# Altium PCB PCB.pcbdoc (part 1 of 2)
Units mil, origin at the board's own origin, x right, y up, seen from the top; angles counter-clockwise.
Board outline 3545 x 2665 mil, 4 copper layers (Top Layer, VCC, GND, Bottom Layer), stack 62.447 mil thick; 58 components, 38 nets, 229 pads, 78 vias.
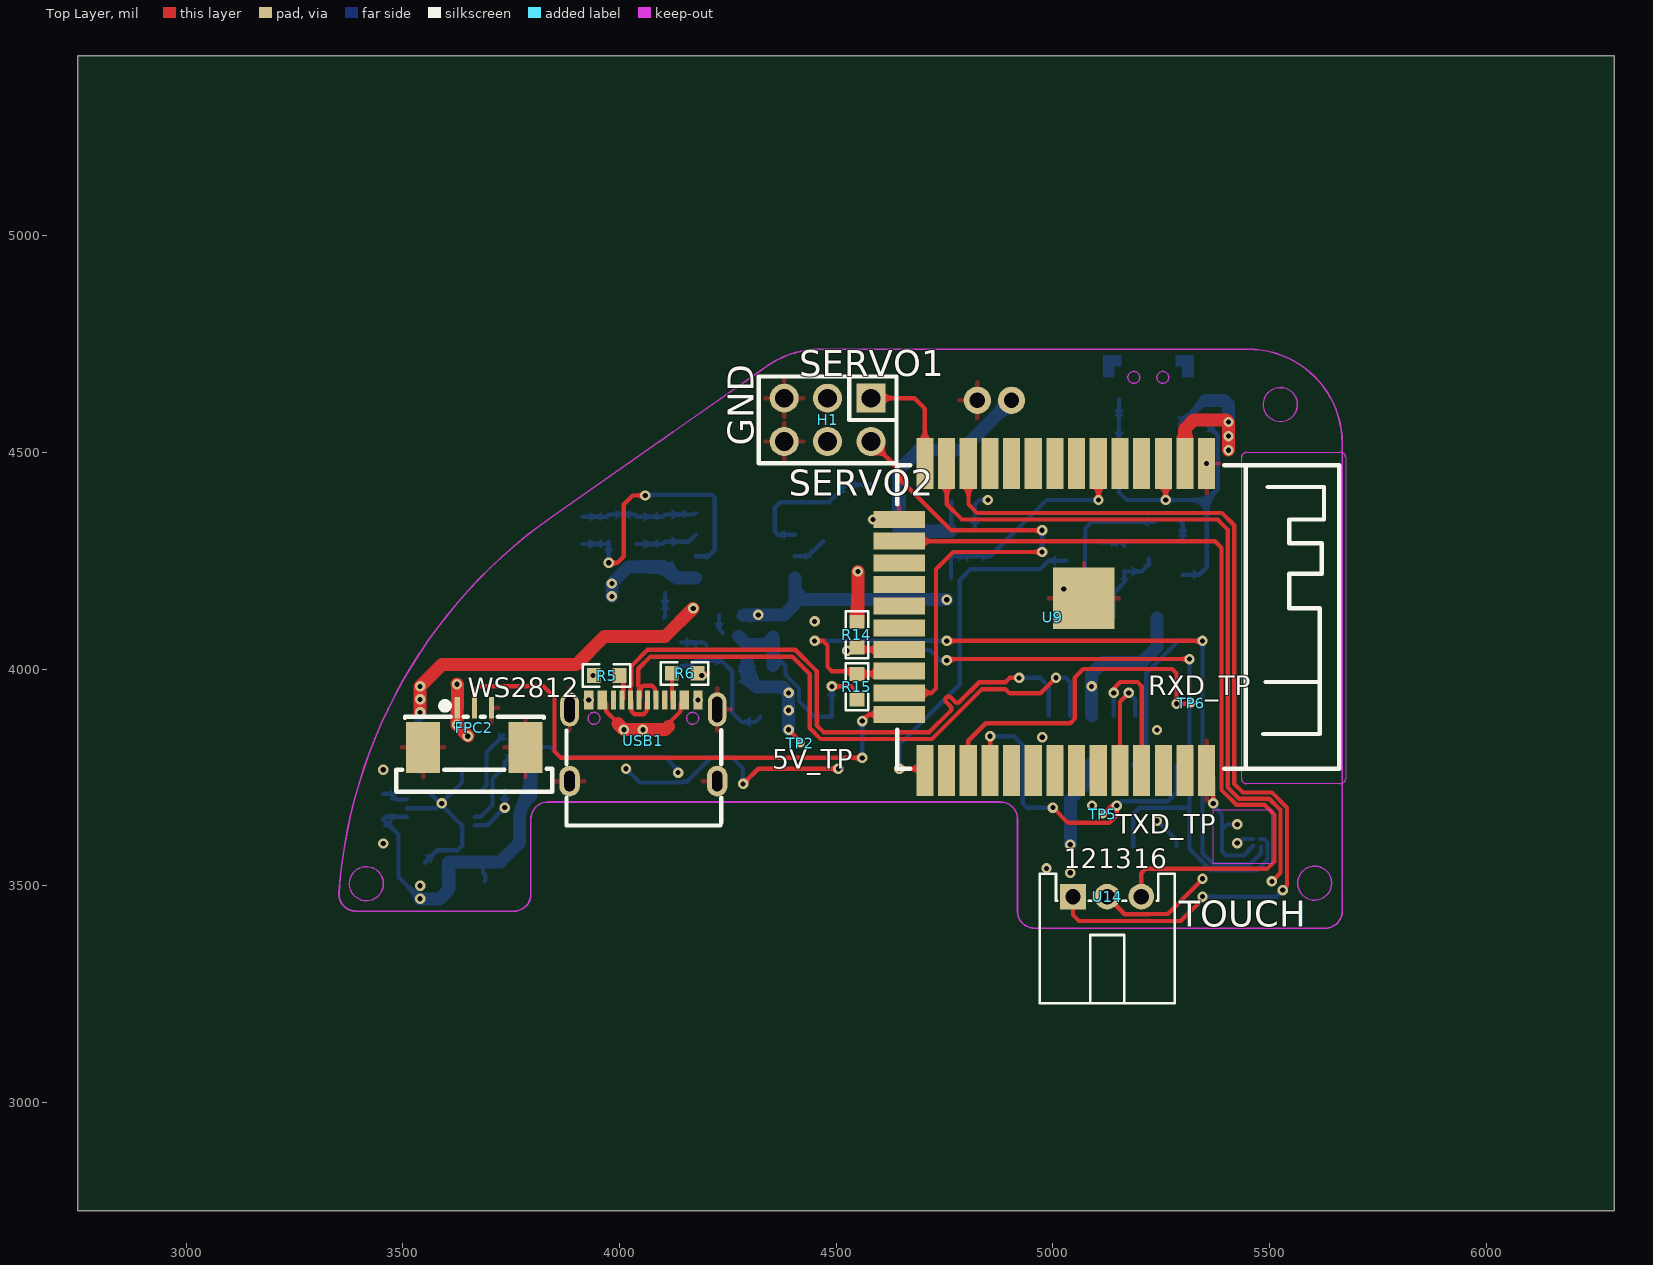
[diagram p0: Top Layer view]
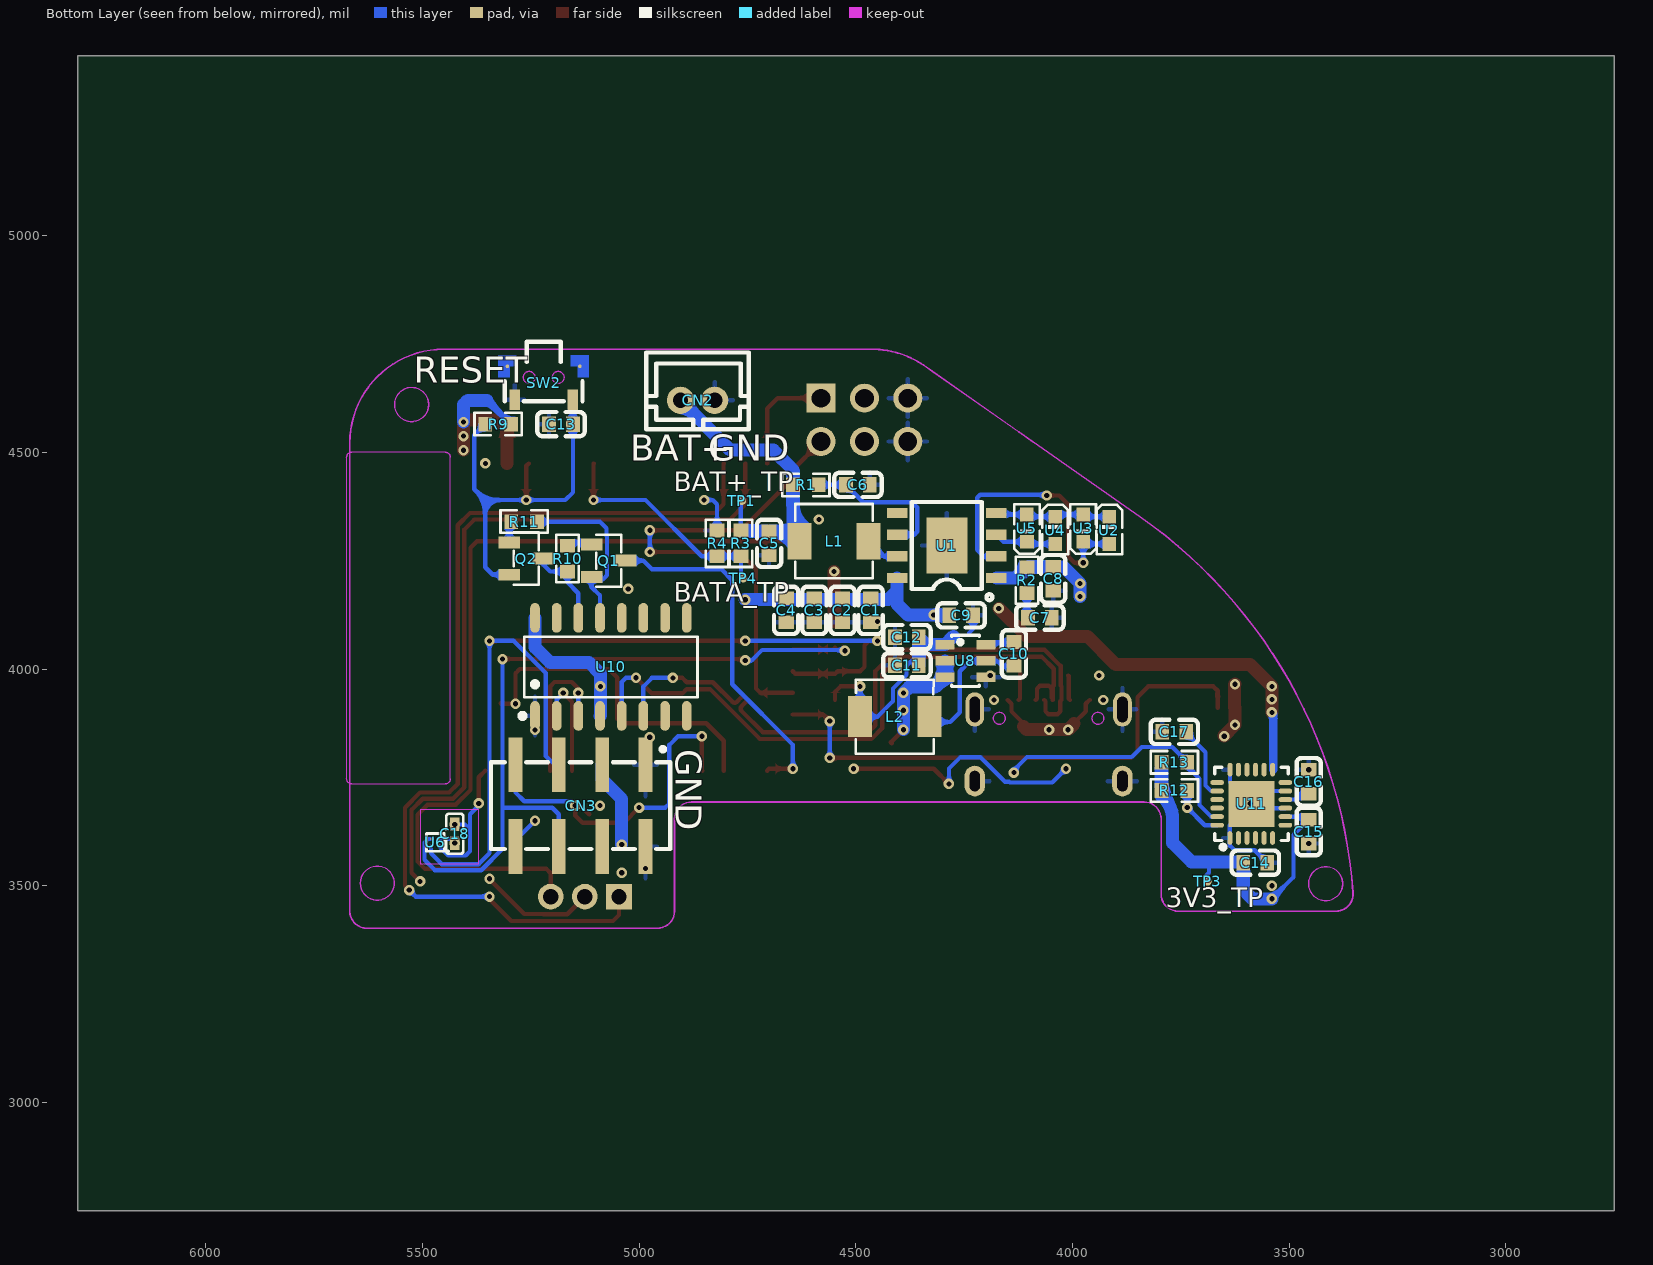
[diagram p1: Bottom Layer view, seen from below]
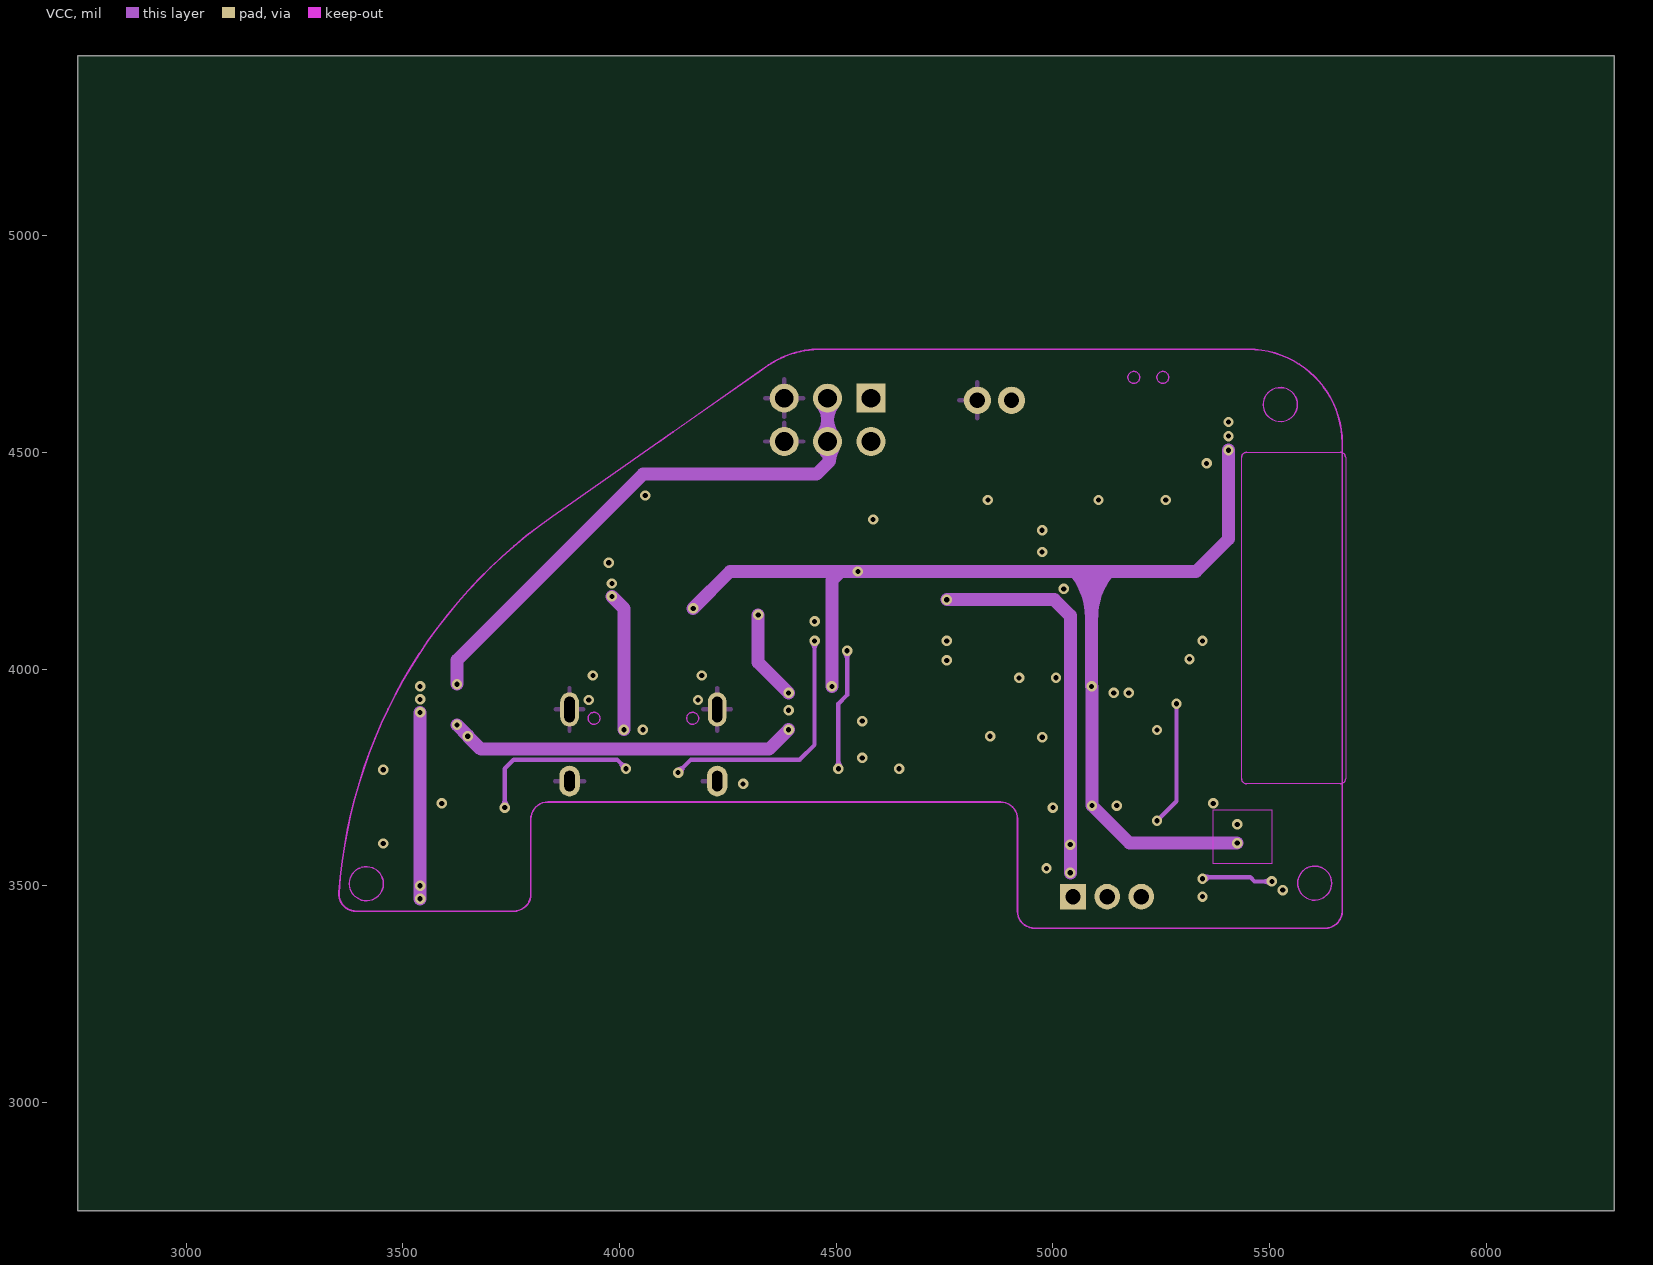
[diagram p2: VCC]
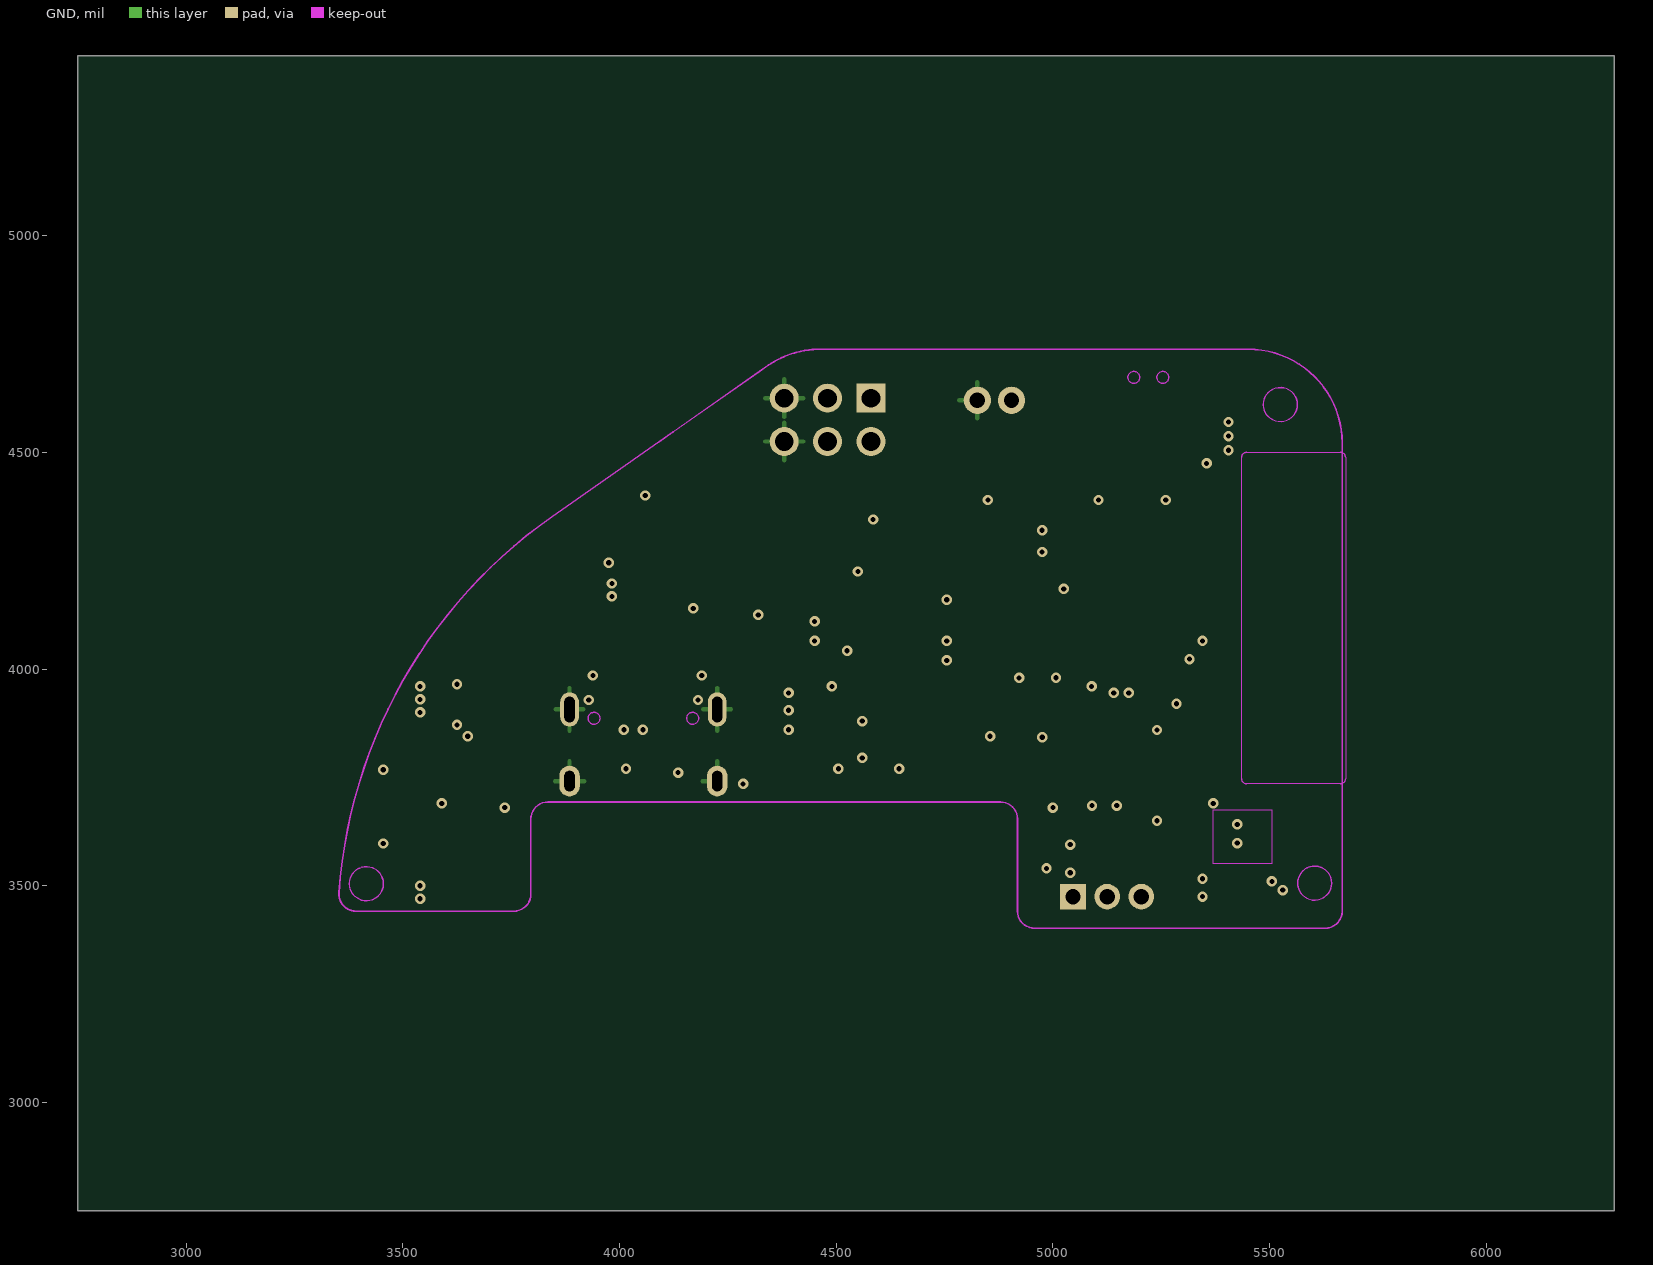
[diagram p3: GND]

## Layer stack, top to bottom
Top Layer: signal copper 1.378
Dielectric1: surface 8.283, 7628 RC49% 8.6mil, Dk 0
VCC: signal copper 0.598
Dielectric2: surface 41.929, 1.1mm H/HOZ Copper, Dk 0
GND: signal copper 0.598
Dielectric3: surface 8.283, 7628 RC49% 8.6mil, Dk 0
Bottom Layer: signal copper 1.378

## Board outline
6295,2750 2750,2750 2750,5415 6295,5415

## Design rules (kind name [scope] priority, off if disabled: settings)
BoardOutlineClearance copperThickness1oz [All] p0: genericclearance=10 ignorepadtopadclearanceinfootprint=FALSE except(0: Arc-SplitContinuation Track-SplitContinuation SMDPad-SplitContinuation THPad-SplitContinuation Via-SplitContinuation Fill-SplitContinuation Poly-SplitContinuation Region-SplitContinuation Text-SplitContinuation)
BoardOutlineClearance copperThickness2oz [All] p0: genericclearance=10 ignorepadtopadclearanceinfootprint=FALSE except(0: Arc-SplitContinuation Track-SplitContinuation SMDPad-SplitContinuation THPad-SplitContinuation Via-SplitContinuation Fill-SplitContinuation Poly-SplitContinuation Region-SplitContinuation Text-SplitContinuation)
BoardOutlineClearance otherClearance [All] p0: genericclearance=10 ignorepadtopadclearanceinfootprint=FALSE except(0: Arc-SplitContinuation Track-SplitContinuation SMDPad-SplitContinuation THPad-SplitContinuation Via-SplitContinuation Fill-SplitContinuation Poly-SplitContinuation Region-SplitContinuation Text-SplitContinuation)
Clearance copperThickness1oz [All] p1: gap=7 ignorepadtopadclearanceinfootprint=FALSE
Clearance copperThickness2oz [All] p1: gap=7 ignorepadtopadclearanceinfootprint=FALSE
Clearance otherClearance [All] p1: gap=7 ignorepadtopadclearanceinfootprint=FALSE
DiffPairsRouting differentialPair [All] p1: maxuncoupledlength=10 minlimit=6 maxlimit=Infinity mostfreqgap=6 toplayer_minwidth=5 toplayer_prefwidth=10 toplayer_maxwidth=100 bottomlayer_minwidth=5 bottomlayer_prefwidth=10 bottomlayer_maxwidth=100 midlayer1_minwidth=5 midlayer1_prefwidth=10 midlayer1_maxwidth=100 midlayer2_minwidth=5 midlayer2_prefwidth=10 midlayer2_maxwidth=100
PasteMaskExpansion pasteMaskExpansion [All] p1: expansion=0
PlaneConnect innerPlane [All] p1: planeconnectstyle=Relief reliefexpansion=20 reliefentries=4 reliefconductorwidth=10 reliefairgap=10
PolygonConnect copperRegion [All] p1: connectstyle=Relief reliefentries=4 reliefconductorwidth=10 polygonreliefangle="90 Angle" airgapwidth=10
RoutingVias viaSize [All] p1: viastyle="Through Hole" holewidth=12.0078 minholewidth=11.811 maxholewidth=248.0314 width=12.0078 minwidth=11.811 maxwidth=248.0314
SolderMaskExpansion solderMaskExpansion [All] p1: useseparateexpansions=TRUE expansion=2 expansionbottom=2
Width copperThickness1oz [All] p1: maxlimit=100 minlimit=5 preferedwidth=10
Width copperThickness2oz [All] p1: maxlimit=100 minlimit=8 preferedwidth=10

## Components (designator, comment, footprint, x,y, rotation, side; value= is the part's Value field where it differs from the comment)
C1 "" C0603_2 4465.62,4135.42 r90 bottom
C2 "" C0603_2 4530.62,4135.42 r90 bottom
C3 "" C0603_2 4595.62,4135.42 r90 bottom
C4 "" C0603_2 4660.62,4135.42 r90 bottom
C5 "" C0603_2 4700,4290 r90 bottom
C6 "" C0603_2 4495,4425 r0 bottom
C7 "" C0603_2 4075.2,4118.65 r0 bottom
C8 "" C0603_2 4044.57,4208.23 r90 bottom
C9 "" C0603_2 4256.98,4123.74 r0 bottom
C10 "" C0603 4135,4035 r90 bottom
C11 "" C0603_2 4381.98,4008.74 r180 bottom
C12 "" C0603_2 4381.98,4073.74 r180 bottom
C13 "" C0603_2 5180,4565 r180 bottom
C14 "" C0603 3578.24,3553.24 r0 bottom
C15 "" C0603 3455,3625 r90 bottom
C16 "" C0603 3455,3740 r270 bottom
C17 "" C0603_2 3765,3855 r180 bottom
C18 "" C0402 5425,3620 r270 bottom
CN2 "" CONN-TH_B2B-PH-K-S 4865,4620 r180 bottom
CN3 "" HDR-SMD_8P-P2.54-V-F-R2-C4-S7.1 5135,3685 r0 bottom
FPC2 "" FPC-SMD_3P-P1.00_HDGC_1.0K-MX-3PWB 3665,3865 r0 top
H1 "" HDR-TH_6P-P2.54-V-M-R2-C3-S2.54 4480,4575 r180 top
L1 "" IND-SMD_L4.4-W4.2 4550,4295 r180 bottom
L2 "" IND-SMD_L4.4-W4.2-A 4410,3890 r180 bottom
Q1 "" SOT-23-3_L2.9-W1.3-P1.90-LS2.4-BR_1 5070,4250 r0 bottom
Q2 "" SOT-23-3_L2.9-W1.3-P1.90-LS2.4-BR_1 5260,4255 r0 bottom
R1 "" R0603_3 4615,4425 r0 bottom
R2 "" R0603_3 4105,4205 r90 bottom
R3 "" R0603_3 4765,4290 r90 bottom
R4 "" R0603_3 4820,4290 r270 bottom
R5 "" R0603_3 3970,3985 r0 top
R6 "" R0603_3 4150,3990 r180 top
R9 "" R0603_2 5325,4565 r180 bottom
R10 "" R0603_2 5165,4255 r90 bottom
R11 "" R0603_2 5265,4340 r0 bottom
R12 "" R0603_2 3765,3720 r0 bottom
R13 "" R0603_2 3765,3785 r0 bottom
R14 "" R0603_3 4547.72,4079.19 r270 top
R15 "" R0603_3 4547.72,3959.19 r270 top
SW2 "" SW-SMD_2P-TS24CA 5220,4660 r180 bottom
TP1 "" Test-Point-0.5mm#1 4762.85,4388.21 r0 top
TP2 "" Test-Point-0.5mm#2 4417.22,3828.84 r0 top
TP3 "" Test-Point-0.5mm#1 3688.48,3510.1 r0 top
TP4 "" Test-Point-0.5mm#1 4759.74,4209.47 r0 top
TP5 "" Test-Point-0.5mm#2 5115,3665 r0 top
TP6 "" Test-Point-0.5mm#2 5319.11,3921.36 r0 top
U1 "" ESOP-8_L4.9-W3.9-P1.27-LS6.0-BL-EP 4290,4285 r90 bottom
U2 "" LED0603-RD_GREEN 3915,4320 r270 bottom
U3 "" LED0603-RD_GREEN 3975,4325 r90 bottom
U4 "" LED0603-RD_GREEN 4040,4320 r270 bottom
U5 "" LED0603-RD_GREEN 4105,4325 r90 bottom
U6 "" X1-WLB0808-4_L0.8-W0.8-P0.40-TL 5470,3600 r0 bottom
U8 "" TSOT-26_L2.9-W1.6-P0.95-LS2.8-BL_1 4246.98,4018.74 r270 bottom
U9 "" WIRELM-SMD_ESP32-S_1 5000,4120 r270 top
U10 "" SOP-16_L10.0-W3.9-P1.27-LS6.0-BL_1 5065,4005 r180 bottom
U11 "" QFN-24_L4.0-W4.0-P0.50-BL-EP2.7_1 3587.56,3689.03 r180 bottom
U14 "" CONN-TH_3P-P2.00_S3B-PH-K-S-LF-SN 5125,3475 r0 top
USB1 "" USB-C-SMD_TYPE-C-6PIN-2MD-073 4055,3835 r0 top

## Footprints (in the part's own frame and the unit in brackets; to place one, negate y for a bottom-side part, rotate by r counter-clockwise, add the part's x,y. Pads: shape width x height; smd on the part's side, far side on the other; paste and mask are expansions set on the pad)
C0402 [mm]
  rect 0.79x0.54 smd: 1(-0.545,0) 2(0.545,0)
  silkscreen extent -1.17,-0.5 1.17,0.5
C0603 [mm]
  rect 0.8x0.9 smd: 1(-0.7,0) 2(0.7,0)
  silkscreen extent -1.39,-0.71 1.39,0.71
C0603_2 [mm]
  rect 0.8x0.9 smd: 1(-0.7,0) 2(0.7,0)
  silkscreen extent -1.39,-0.71 1.39,0.71
CONN-TH_3P-P2.00_S3B-PH-K-S-LF-SN [mm]
  rect 1.5x1.5 hole 0.9: 1(-2,0)
  round 1.5 hole 0.9: 2(0,0) 3(2,0)
  silkscreen extent -3.95,-6.25 3.95,1.35
CONN-TH_B2B-PH-K-S [mm]
  round 1.6 hole 0.9: 1(1,0) 2(-1,0)
  silkscreen extent -3,-1.7 3,2.8
ESOP-8_L4.9-W3.9-P1.27-LS6.0-BL-EP [mm]
  rect 0.6x1.2 smd: 1(-1.905,-2.908) 2(-0.635,-2.908) 3(0.635,-2.908) 4(1.905,-2.908) 5(1.905,2.908) 6(0.635,2.908) 7(-0.635,2.908) 8(-1.905,2.908)
  rect 3.3x2.4 smd: 9(0,0)
  silkscreen extent -3.2,-2.67 2.55,2.05
FPC-SMD_3P-P1.00_HDGC_1.0K-MX-3PWB [mm]
  rect 0.3x1.25 smd: 1(-1,1.162) 2(0,1.162) 3(1,1.162)
  rect 2x3 smd: 4(3,-1.162) 5(-3,-1.162)
  silkscreen extent -4.57,-3.76 4.58,1.47
HDR-SMD_8P-P2.54-V-F-R2-C4-S7.1 [mm]
  rect 0.8x3.2 smd: 1(-3.81,-2.4) 2(-3.81,2.4) 3(-1.27,-2.4) 4(-1.27,2.4) 5(1.27,-2.4) 6(1.27,2.4) 7(3.81,-2.4) 8(3.81,2.4)
  silkscreen extent -5.25,-3.43 5.25,2.54
HDR-TH_6P-P2.54-V-M-R2-C3-S2.54 [mm]
  rect 1.7x1.7 hole 1.1: 1(-2.54,-1.27)
  round 1.7 hole 1.1: 2(-2.54,1.27) 3(0,-1.27) 4(0,1.27) 5(2.54,-1.27) 6(2.54,1.27)
  silkscreen extent -4.04,-2.54 4.04,2.54
IND-SMD_L4.4-W4.2 [mm]
  rect 1.4x2.12 smd: 1(2.028,0) 2(-2.028,0)
  silkscreen extent -2.28,-2.18 2.28,2.18
IND-SMD_L4.4-W4.2-A [mm]
  rect 1.4x2.4 smd: 1(2.028,0) 2(-2.028,0)
  silkscreen extent -2.28,-2.18 2.28,2.18
LED0603-RD_GREEN [mm]
  rect 0.8x0.8 smd: 1(-0.799,-0.003) 2(0.799,0.003)
  silkscreen extent -1.49,-0.75 1.39,0.76
QFN-24_L4.0-W4.0-P0.50-BL-EP2.7_1 [mm]
  oval 0.28x0.8 smd: 1(-1.25,-2) 2(-0.75,-2) 3(-0.25,-2) 4(0.25,-2) 5(0.75,-2) 6(1.25,-2) 13(1.25,2) 14(0.75,2) 15(0.25,2) 16(-0.25,2) 17(-0.75,2) 18(-1.242,2)
  oval 0.8x0.28 smd: 7(2,-1.25) 8(2,-0.75) 9(2,-0.25) 10(2,0.25) 11(2,0.75) 12(2,1.25) 19(-2,1.25) 20(-2,0.75) 21(-2,0.25) 22(-2,-0.25) 23(-2,-0.75) 24(-2,-1.25)
  rect 2.7x2.7 smd: 25(0.012,0)
  silkscreen extent -2.14,-2.79 2.16,2.15
R0603_2 [mil]
  rect 31.75x34.02 smd: 1(-29.66,0) 2(29.66,0)
  silkscreen extent -55,-26 55,26
R0603_3 [mil]
  rect 31.75x34.02 smd: 1(-29.66,0) 2(29.66,0)
  silkscreen extent -55,-26 55,26
SOP-16_L10.0-W3.9-P1.27-LS6.0-BL_1 [mm]
  oval 0.56x1.745 smd: 1(-4.445,-2.872) 2(-3.175,-2.872) 3(-1.905,-2.872) 4(-0.635,-2.872) 5(0.635,-2.872) 6(1.905,-2.872) 7(3.175,-2.872) 8(4.445,-2.872) 9(4.445,2.872) 10(3.175,2.872) 11(1.905,2.872) 12(0.635,2.872) 13(-0.635,2.872) 14(-1.905,2.872) 15(-3.175,2.872) 16(-4.445,2.872)
  silkscreen extent -5.33,-3.02 5.08,1.77
SOT-23-3_L2.9-W1.3-P1.90-LS2.4-BR_1 [mm]
  rect 1.25x0.7 smd: 1(1,-0.95) 2(1,0.95) 3(-1,0)
  silkscreen extent -0.73,-1.53 0.73,1.53
SW-SMD_2P-TS24CA [mm]
  rect 0.6x1.2 smd: 1(-1.7,-0.975) 2(1.7,-0.975)
  round 0.21 smd: 3(2.125,0.975) 4(-2.125,0.975)
  Top Layer region: -1.6,0.975 -1.6,1.625 -2.65,1.625 -2.65,0.325 -2,0.325 -2,0.975 -1.6,0.975
  Top Layer region: 2.65,0.325 2.65,1.625 1.6,1.625 1.6,0.975 1.6,0.975 2,0.975 2,0.325
  Board Outline Layer circle w0.003: c0.85,0.325 r0.35
  Board Outline Layer circle w0.003: c-0.85,0.325 r0.35
  Board Outline Layer region: 0.5,0.325 0.535,0.173 0.632,0.051 0.772,-0.016 0.928,-0.016 1.068,0.051 1.165,0.173 1.2,0.325 1.2,0.325 1.165,0.477 1.068,0.599 0.928,0.666 0.772,0.666 0.632,0.599 0.535,0.477 0.5,0.325
  Board Outline Layer region: 0.5,0.325 0.535,0.173 0.632,0.051 0.772,-0.016 0.928,-0.016 1.068,0.051 1.165,0.173 1.2,0.325 1.2,0.325 1.165,0.477 1.068,0.599 0.928,0.666 0.772,0.666 0.632,0.599 0.535,0.477 0.5,0.325
  Board Outline Layer region: -1.2,0.325 -1.165,0.173 -1.068,0.051 -0.928,-0.016 -0.772,-0.016 -0.632,0.051 -0.535,0.173 -0.5,0.325 -0.5,0.325 -0.535,0.477 -0.632,0.599 -0.772,0.666 -0.928,0.666 -1.068,0.599 -1.165,0.477 -1.2,0.325
  Board Outline Layer region: -1.2,0.325 -1.165,0.173 -1.068,0.051 -0.928,-0.016 -0.772,-0.016 -0.632,0.051 -0.535,0.173 -0.5,0.325 -0.5,0.325 -0.535,0.477 -0.632,0.599 -0.772,0.666 -0.928,0.666 -1.068,0.599 -1.165,0.477 -1.2,0.325
  silkscreen extent -2.28,-1.07 2.28,2.43
Test-Point-0.5mm#1 [mm]
  round 0.5 smd far side: 1(0,0)
Test-Point-0.5mm#2 [mm]
  round 0.5 smd: 1(0,0)
TSOT-26_L2.9-W1.6-P0.95-LS2.8-BL_1 [mm]
  rect 0.55x1.1 smd: 1(-0.95,-1.2) 2(0,-1.2) 3(0.95,-1.2) 4(0.95,1.2) 5(0,1.2) 6(-0.95,1.2)
  silkscreen extent -1.5,-0.8 1.5,0.8
USB-C-SMD_TYPE-C-6PIN-2MD-073 [mm]
  rect 0.55x1.1 smd: 1(-3.2,2.375) 2(-2.4,2.375) 11(2.4,2.375) 12(3.2,2.375)
  rect 0.3x1.1 smd: 3(-1.75,2.375) 4(-1.25,2.375) 5(-0.75,2.375) 6(-0.25,2.375) 7(0.25,2.375) 8(0.75,2.375) 9(1.25,2.375) 10(1.75,2.375)
  oval 1.2x1.8 hole 0.6 slot 1.2 at 90 deg: 13(-4.325,-2.375) 14(4.325,-2.375)
  oval 1.1x2 hole 0.6 slot 1.5 at 90 deg: 13(-4.325,1.825) 14(4.325,1.825)
  Board Outline Layer circle w0.003: c-2.89,1.305 r0.35
  Board Outline Layer circle w0.003: c2.89,1.305 r0.35
  Board Outline Layer region: -2.54,1.305 -2.575,1.153 -2.672,1.031 -2.812,0.964 -2.968,0.964 -3.108,1.031 -3.205,1.153 -3.24,1.305 -3.24,1.305 -3.205,1.457 -3.108,1.579 -2.968,1.646 -2.812,1.646 -2.672,1.579 -2.575,1.457 -2.54,1.305
  Board Outline Layer region: -2.54,1.305 -2.575,1.153 -2.672,1.031 -2.812,0.964 -2.968,0.964 -3.108,1.031 -3.205,1.153 -3.24,1.305 -3.24,1.305 -3.205,1.457 -3.108,1.579 -2.968,1.646 -2.812,1.646 -2.672,1.579 -2.575,1.457 -2.54,1.305
  Board Outline Layer region: 3.24,1.305 3.205,1.153 3.108,1.031 2.968,0.964 2.812,0.964 2.672,1.031 2.575,1.153 2.54,1.305 2.54,1.305 2.575,1.457 2.672,1.579 2.812,1.646 2.968,1.646 3.108,1.579 3.205,1.457 3.24,1.305
  Board Outline Layer region: 3.24,1.305 3.205,1.153 3.108,1.031 2.968,0.964 2.812,0.964 2.672,1.031 2.575,1.153 2.54,1.305 2.54,1.305 2.575,1.457 2.672,1.579 2.812,1.646 2.968,1.646 3.108,1.579 3.205,1.457 3.24,1.305
  silkscreen extent -4.5,-4.97 4.57,0.6
WIRELM-SMD_ESP32-S_1 [mm]
  rect 3x1 smd: 1(-9,9.005) 2(-9,7.735) 3(-9,6.465) 4(-9,5.195) 5(-9,3.925) 6(-9,2.655) 7(-9,1.385) 8(-9,0.115) 9(-9,-1.155) 10(-9,-2.425) 11(-9,-3.695) 12(-9,-4.965) 13(-9,-6.235) 14(-9,-7.505) 25(9,-7.505) 26(9,-6.235) 27(9,-4.965) 28(9,-3.695) 29(9,-2.425) 30(9,-1.155) 31(9,0.115) 32(9,1.385) 33(9,2.655) 34(9,3.925) 35(9,5.195) 36(9,6.465) 37(9,7.735) 38(9,9.005)
  rect 1x3 smd: 15(-5.715,-9.005) 16(-4.445,-9.005) 17(-3.175,-9.005) 18(-1.905,-9.005) 19(-0.635,-9.005) 20(0.635,-9.005) 21(1.905,-9.005) 22(3.175,-9.005) 23(4.445,-9.005) 24(5.715,-9.005)
  rect 3.6x3.6 smd: 39(-1.105,1.815)
  silkscreen extent -8.89,-9.13 8.89,16.78
X1-WLB0808-4_L0.8-W0.8-P0.40-TL [mm]
  round 0.18 smd: A1(-0.2,0.2) A2(0.2,0.2) B1(-0.2,-0.2) B2(0.2,-0.2)
  silkscreen extent -0.8,-0.52 0.52,0.55

## Via types
v1: diameter 24.02, hole 12.01, Top Layer to Bottom Layer, 78 vias

## Nets (pads, with @x,y where several pads share a name; then routed paths per layer and width w, separated by ;. In a path a pad name is that pad's centre, name@x,y a point inside that pad or via, vN(x,y) a via of type N, cw(c..) or ccw(c..) an arc to the next point about the centre after c; other vN are vias at no path point)
$1N29: C17.2 U11.20 | length 164.4
  Bottom Layer w10: U11.20@3666.3,3718.56 3680.19,3718.56 3693.04,3731.41 3693.04,3808.04 C17.2@3732.44,3847.44
$1N30: C16.2 U11.10 | length 59.4
  Bottom Layer w10: C16.2@3455,3712.44 3472.56,3712.44 3486.13,3698.87 U11.10@3508.82,3698.87
$1N50: Q2.1 R11.2 | length 49.6
  Bottom Layer w10: R11.2@5294.66,4340 5299.37,4335.29 Q2.1@5299.37,4292.4
$1N52: Q1.1 R10.2 | length 58.8
  Bottom Layer w10: Q1.1@5109.37,4292.4 5157.26,4292.4 R10.2@5165,4284.66
$1N75: C10.1 L2.1 U8.5 | length 307.4
  Bottom Layer w10: C10.1@4141.98,4006.18 4161.18,4006.18 4173.74,4018.74 U8.5@4199.73,4018.74 4236.26,4018.74 4260,3995 4260,3900 4282.07,3877.93 4313.09,3877.93 L2.1@4325.16,3890
$1N76: C10.2 U8.6 | length 59.9
  Bottom Layer w10: C10.2@4141.98,4061.3 4194.58,4061.3 U8.6@4199.73,4056.14
$1N104: U1.3 U4.2 U5.1 | length 144.5
  Bottom Layer w10: U4.2@4039.86,4288.52 4099.87,4288.52 U5.1@4104.87,4293.52 4159.02,4293.52 U1.3@4175.5,4310
$1N105: U1.4 U2.1 U3.2 U4.1 U5.2 | length 268
  Bottom Layer w10: U2.1@3915.13,4351.48 3970.14,4351.48 U3.2@3975.14,4356.48 4035.13,4356.48 U4.1@4040.13,4351.48 4100.14,4351.48 U5.2@4105.14,4356.48 4171.98,4356.48 U1.4@4175.5,4360
$1N106: U1.2 U2.2 U3.1 | length 664.7
  Top Layer w10: v1(3975,4245) 3995,4245 4010,4260 4010,4380 4030.43,4400.43 v1(4059.57,4400.43)
  Bottom Layer w10: U2.2@3914.86,4288.52 3969.87,4288.52 U3.1@3974.87,4293.52 3975,4293.39 v1(3975,4245) ; v1(4059.57,4400.43) 4061.21,4402.07 4212.93,4402.07 4220,4395 4220,4275 4205,4260 U1.2@4175.5,4260
$1N108: C7.2 R2.1 | length 57.6
  Bottom Layer w10: C7.2@4102.76,4118.65 4105,4120.89 R2.1@4105,4175.34
$1N115: C6.2 R1.1 U1.6 | length 354.3
  Bottom Layer w10: U1.6@4404.5,4310 4365,4310 4357.93,4317.07 4357.93,4372.93 4370,4385 4482.56,4385 C6.2@4522.56,4425 R1.1@4585.34,4425
$1N117: L1.1 U1.7 | length 80.2
  Bottom Layer w10: U1.7@4404.5,4260 4435.16,4260 L1.1@4470.16,4295
$1N272: R6.2 USB1.10 | length 63
  Top Layer w10: R6.2@4120.34,3990 4121.1,3989.24 4121.1,3931.31 USB1.10@4123.9,3928.51
$1N273: R5.2 USB1.4 | length 58.1
  Top Layer w10: USB1.4@4005.8,3928.51 4008.59,3931.3 4008.59,3983.93 R5.2@4009.66,3985
+5V: C8.2 R2.2 U1.1 USB1.2 USB1.11 | length 839.8
  Top Layer w10: USB1.2@3960.51,3928.51 3969.22,3919.8 3969.22,3902.3 3996.16,3875.35 3996.16,3873.84 ; 4112.96,3867.27 4112.96,3874.47 4140.79,3902.3 4140.79,3919.8 USB1.11@4149.49,3928.51
  Top Layer w30: 3996.16,3873.84 v1(4010,3860) v1(4053.94,3860) 4105.69,3860 4112.96,3867.27
  VCC w30: v1(3982.44,4167.56) 4010,4140 v1(4010,3860)
  Bottom Layer w30: v1(3982.44,4167.56) v1(3982.44,4197.44) 4020.79,4235.79 C8.2@4044.57,4235.79 4103.87,4235.79 R2.2@4105,4234.66 4127.46,4212.2 4130.7,4212.2 4132.9,4210 U1.1@4175.5,4210
BAT_+: C5.2 CN2.2 L1.2 R1.2 R3.2 TP1.1 | length 666.8
  Bottom Layer w10: R3.2@4765,4319.66 TP1.1@4765,4386.06
  Bottom Layer w30: R3.2@4765,4319.66 4762.9,4317.56 C5.2@4700,4317.56 4652.4,4317.56 4644.66,4309.82 R1.2@4644.66,4425 4644.66,4459.66 4690,4505 4789.37,4505 CN2.2@4904.37,4620
BAT_ADC: R3.1 R4.2 TP4.1 U9.6 | length 529.2
  Top Layer w10: U9.6@5104.53,4474.33 5105,4473.86 v1(5105,4390)
  Bottom Layer w10: TP4.1@4764.74,4209.47 4764.74,4260.08 R3.1@4765,4260.34 R4.2@4820,4260.34 4855.34,4260.34 4985,4390 v1(5105,4390)
DTR: Q1.2 R11.1 U10.13 | length 424.9
  Bottom Layer w10: U10.13@5090,4118.09 5090,4170 5110,4190 5110,4216.97 Q1.2@5109.37,4217.6 ; Q1.2@5109.37,4212.6 5104.7,4207.93 5082.07,4207.93 5073.78,4216.22 5073.78,4305.73 5075,4306.95 5075,4325 5090,4340 R11.1@5235.34,4340
EN: C13.2 Q2.2 R9.1 SW2.2 U9.3 | length 924.4
  Top Layer w10: U9.3@5254.53,4474.33 5260,4468.86 v1(5260,4390)
  Bottom Layer w10: SW2.2@5153.07,4621.61 5152.44,4620.98 C13.2@5152.44,4565 5152.44,4407.56 5170,4390 v1(5260,4390) 5355,4390 ; Q2.2@5299.37,4217.6 5337.6,4217.6 5355,4235 5355,4390 ; R9.1@5354.66,4565 5380,4539.66 5380,4415 5355,4390
GND: C1.1 C2.1 C3.1 C4.1 C5.1 C6.1 C7.1 C8.1 C9.1 C11.1 C12.1 C13.1 C14.1 C15.1 C16.1 C17.1 C18.1 CN2.1 CN3.1 CN3.2 FPC2.3 FPC2.4 FPC2.5 H1.5 H1.6 R4.1 R5.1 R6.1 SW2.1 U1.9 U6.A1 U8.4 U9.1 U9.15 U9.38 U9.39 U10.1 U11.1 U11.9 U11.11 U11.18 U11.25 USB1.1 USB1.12 USB1.13 USB1.14 | length 957.9
  Top Layer w10: U9.38@5354.53,3765.67 5370,3750.2 v1(5370,3690)
  Bottom Layer w10: U11.9@3508.82,3679.19 3577.23,3679.19 U11.25@3587.07,3689.03 ; U11.11@3508.82,3718.56 3557.54,3718.56 U11.25@3587.07,3689.03 ; C14.1@3550.68,3553.24 3579.38,3581.94 3626.09,3581.94 3636.77,3592.62 U11.1@3636.77,3610.29 3636.77,3639.33 U11.25@3587.07,3689.03 ; U11.18@3636.46,3767.77 3636.46,3738.42 U11.25@3587.07,3689.03 ; C9.1@4229.41,4123.74 4229.41,4092.65 4238.83,4083.24 ; R4.1@4820,4319.66 4820,4380 4830,4390 v1(4850,4390) ; v1@5365,3690 5390,3665 5390,3630 ; v1(5425,3641.46) 5401.46,3641.46 5390,3630 ; U6.A1@5462.13,3592.12 5440.01,3570 5400,3570 5390,3580 5390,3630
  other v1: 4985,3540 3455,3597.44 3590,3690 3455,3767.56 4975.14,3842.69 5240,3859.33 3929.01,3928.51 4180.98,3928.51 3938.7,3985 4189.66,3985 4450,4110 5025,4185 4585,4345 5354.53,4474.33
IO0: Q1.3 U9.25 | length 818.6
  Top Layer w10: v1(4645,3770) 4700.2,3770 U9.25@4704.53,3765.67
  Bottom Layer w10: v1(4645,3770) 4645,3825 4785,3965 4785,4205 4810,4230 4970,4230 4990,4250 Q1.3@5030.63,4250
LED_DI: FPC2.2 U9.24 | length 1256.6
  Top Layer w10: FPC2.2@3665,3910.76 3665,3950 3675,3960 3825,3960 3850,3935 3850,3810 3865,3795 v1(4560,3795) ; v1(4560,3880) 4575,3895 U9.24@4645.47,3895
  Bottom Layer w10: v1(4560,3795) v1(4560,3880)
RTS: Q2.3 R10.1 U10.14 | length 194.2
  Bottom Layer w10: U10.14@5140,4118.09 5140,4175 5165,4200 R10.1@5165,4225.34 5165.34,4225 5205,4225 5220.63,4240.63 Q2.3@5220.63,4255
RXD: U9.34 U10.2 | length 247.1
  Top Layer w10: U9.34@5154.53,3765.67 5154.53,3924.53 v1(5175,3945)
  Bottom Layer w10: v1(5175,3945) 5190,3930 U10.2@5190,3891.91
RXD_TO_WATCHER: CN3.8 TP6.1 U9.27 | length 1149.1
  Top Layer w10: U9.27@4804.53,3765.67 4804.53,3834.53 4845,3875 5040,3875 5050,3885 5050,3980 5070,4000 5275,4000 5285,3990 v1(5285,3920) 5317.76,3920 TP6.1@5319.11,3921.36
  VCC w10: v1(5240,3650) 5285,3695 v1(5285,3920)
  Bottom Layer w10: v1(5240,3650) 5285,3605 CN3.8@5285,3590.51
SCL: CN3.5 R13.1 R15.1 U6.A2 U9.22 U11.23 | length 3390.7
  Top Layer w10: v1(4450,4065) 4470,4065 4480,4055 4480,4005 4490,3995 4541.57,3995 R15.1@4547.72,3988.85 4639.32,3988.85 U9.22@4645.47,3995 ; v1(4755,4065) v1(5345,4065)
  VCC w10: v1(4135.18,3761.17) 4165,3790.98 4415.98,3790.98 4450,3825 v1(4450,4065)
  Bottom Layer w10: U11.23@3666.3,3659.5 3680.18,3659.5 3707.05,3686.37 3707.05,3746.71 3735.34,3775 3735.34,3785.34 3770,3820 3840.36,3820 3863.39,3796.97 4105,3796.97 4135.18,3766.79 v1(4135.18,3761.17) ; v1(4450,4065) v1(4755,4065) ; CN3.5@5185,3779.49 5195,3779.49 5215,3799.49 5215,3991.04 5288.96,4065 v1(5345,4065) 5345,3575 5370,3550 5455,3550 5480,3575 U6.A2@5480,3590
SDA: CN3.6 R12.1 R14.2 U6.B2 U9.21 U11.24 | length 3228
  Top Layer w10: v1(4285,3735) 4320,3770 v1(4505,3770) ; v1@4525,4044.02 4542.21,4044.02 R14.2@4547.72,4049.53 4552.25,4045 U9.21@4645.47,4045 ; v1(4755,4020) 4757.99,4022.99 v1(5315,4022.99)
  VCC w10: v1(3735.34,3680.34) 3735.34,3770.34 3755.98,3790.98 3994.02,3790.98 v1(4015,3770) ; v1(4505,3770) 4505,3920 4525,3940 v1@4525,4044.02
  Bottom Layer w10: U11.24@3666.3,3639.82 3694.82,3639.82 v1(3735.34,3680.34) R12.1@3735.34,3720 ; v1(4015,3770) 4046.83,3738.17 4144.7,3738.17 4146.53,3740 4155.53,3740 4211.69,3796.16 4259.19,3796.16 4285,3770.36 v1(4285,3735) ; v1@4525,4044.02 4715.98,4044.02 4740,4020 v1(4755,4020) ; CN3.6@5185,3590.51 5185,3665 5200,3680 5313.85,3680 5315,3681.15 ; v1(5315,4022.99) 5315,3681.15 ; U6.B2@5477.87,3607.88 5487.12,3607.88 5495,3600 5495,3560 5470.98,3535.98 5364.19,3535.98 5315,3585.18 5315,3681.15
  other v1: 4525,4042.01
SERVO1: H1.1 U9.14 | length 260.8
  Top Layer w10: H1.1@4580,4625 4680,4625 4704.53,4600.47 U9.14@4704.53,4474.33
SERVO2: H1.2 U9.23 | length 1167.1
  Top Layer w10: H1.2@4580,4525 4650,4455 4650,4434.59 4680.3,4404.29 4680.71,4404.29 4765,4320 v1(4975,4320) ; U9.23@4645.47,3945 4720,3945 4730,3955 4730,4230 4770,4270 v1(4975,4270)
  Bottom Layer w10: v1(4975,4270) v1(4975,4320)
TOUCH1: U9.12 U14.1 | length 2228.2
  Top Layer w10: U9.12@4804.53,4474.33 4805,4473.86 4805,4380 4825,4360 5390,4360 5418.19,4331.81 5418.19,3734.96 5438.14,3715 5505,3715 5540,3680 5540,3500 v1(5530,3490) ; U14.1@5046.26,3475 5046.26,3432.54 5060,3418.8 5295,3418.82 5345,3468.82 v1(5345,3475)
  Bottom Layer w10: v1(5345,3475) 5515,3475 v1(5530,3490)
TOUCH2: U9.13 U14.2 | length 2115.3
  Top Layer w10: U9.13@4754.53,4474.33 4755,4473.86 4755,4380 4789.91,4345.09 5379.91,4345.09 5402.93,4322.07 5402.93,3727.07 5410,3720 5410.18,3720 5429.19,3700.98 5499.02,3700.98 5525,3675 5525,3530 v1(5505,3510) ; U14.2@5125,3475 5165.51,3434.49 5220.52,3434.49 5221.03,3435 5265,3435 5345,3515 v1(5345,3515.97)
  VCC w10: v1(5345,3515.97) 5349.03,3520 5455,3520 5465,3510 v1(5505,3510)
TOUCH3: U9.16 U14.3 | length 1934.6
  Top Layer w10: U9.16@4645.47,4295 5373.91,4295 5388.91,4280 5388.91,3721.27 5423.21,3686.97 5488.03,3686.97 5510.98,3664.02 5510.98,3555.98 5493.97,3538.97 5213.74,3538.97 5203.74,3528.97 U14.3@5203.74,3475
TXD: U9.35 U10.3 | length 332.6
  Top Layer w10: v1(5140,3945) 5140,3955 5155,3970 5195,3970 5204.53,3960.47 U9.35@5204.53,3765.67
  Bottom Layer w10: U10.3@5140,3891.91 v1(5140,3945)
TXD_TO_WATCHER: CN3.7 TP5.1 U9.28 | length 818.7
  Top Layer w10: U9.28@4854.53,3765.67 4855,3766.14 v1(4855,3845) ; v1(4999.77,3680.23) 5035,3645 5130,3645 5147.07,3662.07 v1(5147.07,3685) 5135,3685 TP5.1@5115,3665
  Bottom Layer w10: v1(4855,3845) 4910,3845 4930,3825 4930,3690 4939.77,3680.23 v1(4999.77,3680.23) ; v1(5147.07,3685) 5157.07,3695 5265,3695 5285,3715 CN3.7@5285,3779.49
USB_DN: U10.6 USB1.5 USB1.7 | length 1475.3
  Top Layer w10: USB1.7@4064.84,3928.51 4062.04,3925.7 4062.04,3902.3 4055.61,3895.87 4034.7,3895.87 4028.27,3902.3 4028.27,3925.71 USB1.5@4025.47,3928.51 4025.47,3960.16 4027.32,3962 4027.32,4007.32 4064.69,4044.69 4405.31,4044.69 4454.69,3995.31 4454.69,3870.31 4470.52,3854.48 4714.48,3854.48 4763.45,3903.45 ccw(c4758.14,3908.75) 4763.45,3914.05 4754.05,3923.45 cw(c4759.36,3928.75) 4764.66,3934.05 4774.05,3924.66 ccw(c4779.36,3929.96) 4784.66,3924.66 4829.69,3969.69 4890,3969.69 4899.91,3979.6 v1(4921.92,3979.6)
  Bottom Layer w10: v1(4921.92,3979.6) 4970.4,3979.6 4990,3960 U10.6@4990,3891.91
USB_DP: U10.5 USB1.6 USB1.8 | length 1476.1
  Top Layer w10: USB1.8@4084.53,3928.51 4081.73,3931.3 4081.73,3954.71 4075.3,3961.14 4054.39,3961.14 4047.96,3954.71 4047.96,3934.24 4046.04,3932.33 4046.04,3929.39 USB1.6@4045.16,3928.51 4045.16,3960.16 4043.32,3962 4043.32,4000.69 4071.31,4028.69 4398.69,4028.69 4438.69,3988.69 4438.69,3863.69 4463.89,3838.48 4721.11,3838.48 4836.31,3953.69 4890,3953.69 4899.91,3943.77 4970.78,3943.77 v1(5007.01,3980)
  Bottom Layer w10: v1(5007.01,3980) 5030,3980 5040,3970 U10.5@5040,3891.91
VCC_5V: C1.2 C2.2 C3.2 C4.2 C9.2 CN3.3 FPC2.1 H1.3 H1.4 TP2.1 U1.8 U8.2 U8.3 | length 4328.2
  Top Layer w10: v1(4390,3860) 4419.19,3830.81 TP2.1@4417.22,3828.84
  Top Layer w30: FPC2.1@3625,3910.76 v1(3625,3871.1) 3650,3846.1 v1(3650,3845) ; v1(3625,3965) 3625.63,3964.37 FPC2.1@3625.63,3910.76
  VCC w30: v1(3625,3871.1) 3650,3846.1 v1(3650,3845) 3680,3815 4345,3815 v1(4390,3860) ; v1(3625,3965) 3625,4020.28 4054.72,4450 4455,4450 4485,4480 4485,4520 H1.4@4480,4525 H1.3@4480,4625 ; v1(4320.03,4125) 4320.03,4014.97 v1(4390,3945) ; v1(4755,4160) 5003.34,4160 5040,4123.34 v1(5040,3595) v1(5040,3530)
  Bottom Layer w30: C9.2@4284.53,4123.74 4285.79,4125 v1(4320.03,4125) 4380,4125 4404.5,4149.5 4404.5,4180.5 ; U8.2@4294.22,4018.74 U8.3@4294.22,3981.34 4317.33,3958.23 4376.77,3958.23 v1(4390,3945) v1(4390,3905) v1(4390,3860) ; U1.8@4404.5,4210 4404.5,4180.5 ; C4.2@4660.62,4162.98 C4.2@4657.64,4160 ; v1(4755,4160) C4.2@4657.64,4160 ; v1(5040,3595) 5040,3700 5085,3745 CN3.3@5085,3779.49 ; 4404.5,4180.5 4425,4160 C4.2@4657.64,4160
VDD_3V3: C11.2 C12.2 C14.2 C15.2 C18.2 L2.2 R9.2 R12.2 R13.2 R14.1 R15.2 TP3.1 U6.B1 U8.1 U9.2 U10.4 U10.16 U11.8 U11.13 | length 6292.9
  Top Layer w10: v1(4490,3960) 4535,3960 4547.72,3947.28 R15.2@4547.72,3929.53
  Top Layer w30: v1(3540,3900) v1(3540,3930) v1(3540,3960) 3590,4010 3900,4010 3965,4075 4105,4075 v1(4170,4140) ; R14.1@4547.72,4108.85 4550,4111.13 v1(4550,4225) ; U9.2@5304.53,4474.33 5304.53,4554.53 5325,4575 5400,4575 v1(5405,4570) v1(5405,4537.36) v1(5405,4505)
  VCC w30: v1(3540,3470) v1(3540,3500) v1(3540,3900) ; v1(4170,4140) 4255,4225 4510,4225 ; v1(4490,3960) 4490,4087.55 ; 4490.06,4087.61 4490,4205 4510,4225 ; v1(5405,4505) 5405,4300 5330,4225 5089.17,4225 ; v1(5425,3598.54) 5176.46,3598.54 v1(5090,3685) 5090,3959.17 v1(5089.17,3960) 5089.17,4225 ; 4510,4225 v1(4550,4225) 5089.17,4225
  Bottom Layer w10: U11.8@3508.82,3659.5 3461.94,3659.5 C15.2@3455,3652.56 3490,3617.56 3490,3520 v1(3540,3470) ; 3685,3545 3685,3530 3690,3525 3690,3511.61 TP3.1@3688.48,3510.1 ; C11.2@4354.41,4008.74 4362.74,4017.07 4372.93,4017.07 4382.8,4007.2 4382.8,3986.48 4414.02,3955.26 4414.02,3925.98 4450,3890 L2.2@4489.84,3890 4490,3890.16 v1(4490,3960) ; v1(5425,3598.54) 5434.34,3607.88 U6.B1@5462.13,3607.88
  Bottom Layer w15: R9.2@5295.34,4565 5350.34,4620
  Bottom Layer w20: U11.13@3536.54,3767.77 3536.54,3896.54 v1(3540,3900)
  Bottom Layer w30: v1(3540,3470) 3585,3470 3605.8,3490.8 C14.2@3605.8,3553.24 3607.56,3555 3725,3555 3768.71,3598.71 3768.71,3653.95 cw(c3834.88,3653.95) 3794.66,3706.49 R12.2@3794.66,3720 ; R12.2@3794.66,3725 R13.2@3794.66,3775 ; 4275,4075.36 U8.1@4294.22,4056.14 4336.82,4056.14 C12.2@4354.41,4073.74 C11.2@4354.41,4008.74 ; U10.4@5090,3891.91 5089.17,3892.74 v1(5089.17,3960) 5089.17,3989.17 5115,4015 5205,4015 5240,4050 U10.16@5240,4118.09 ; 5350.34,4620 5395,4620 5405,4610 v1(5405,4570)
pads on no net: CN3.4 SW2.3 SW2.4 U1.5 U9.4 U9.5 U9.7 U9.8 U9.9 U9.10 U9.11 U9.17 U9.18 U9.19 U9.20 U9.26 U9.29 U9.30 U9.31 U9.32 U9.33 U9.36 U9.37 U10.7 U10.8 U10.9 U10.10 U10.11 U10.12 U10.15 U11.2 U11.3 U11.4 U11.5 U11.6 U11.7 U11.12 U11.14 U11.15 U11.16 U11.17 U11.19 U11.21 U11.22 USB1.3 USB1.9

## Polygon pours and split planes (outlines as drawn)
GND on Top Layer (solid, remove dead copper, pour order 0): 3000,4855 5965,4855 5965,3235 3000,3235
GND on VCC (solid, remove dead copper): 3165,4980 5850,4980 5850,3135 3165,3135
GND on GND (solid, remove dead copper): 3070,5020 5985,5020 5985,3110 3070,3110
GND on Bottom Layer (solid, remove dead copper, pour order 2): 3060,5165 6045,5165 6045,3000 3060,3000

## Keep-outs
Board Outline Layer:
  region: 5370,3675 5505,3675 5505,3550.29 5370,3550.29
  region: 5563.99,4610.25 cw(c5524.62,4610.25) 5485.25,4610.25 cw(c5524.62,4610.25)
  circle w0.1: c5524.62,4610.25 r39.37
  region: 5563.99,4610.25 cw(c5524.62,4610.25) 5485.25,4610.25 cw(c5524.62,4610.25)
  region: 5643.09,3506.03 cw(c5603.72,3506.03) 5564.35,3506.03 cw(c5603.72,3506.03)
  circle w0.1: c5603.72,3506.03 r39.37
  region: 5643.09,3506.03 cw(c5603.72,3506.03) 5564.35,3506.03 cw(c5603.72,3506.03)
  region: 3455.39,3504.75 cw(c3416.02,3504.75) 3376.65,3504.75 cw(c3416.02,3504.75)
  circle w0.1: c3416.02,3504.75 r39.37
  region: 3455.39,3504.75 cw(c3416.02,3504.75) 3376.65,3504.75 cw(c3416.02,3504.75)
  region: 5446.81,4500 5663.19,4500 cw(c5663.19,4488.19) 5675,4488.19 5675,3746.81 cw(c5663.19,3746.81) 5663.19,3735 5446.81,3735 cw(c5446.81,3746.81) 5435,3746.81 5435,4488.19 cw(c5446.81,4488.19)
  region: 5446.81,4500 5663.19,4500 cw(c5663.19,4488.19) 5675,4488.19 5675,3746.81 cw(c5663.19,3746.81) 5663.19,3735 5446.81,3735 cw(c5446.81,3746.81) 5435,3746.81 5435,4488.19 cw(c5446.81,4488.19)
  lines w0.1: 5435,3746.81 ccw(c5446.81,3746.81) 5446.81,3735 5663.19,3735 ccw(c5663.19,3746.81) 5675,3746.81 5675,4488.19 ccw(c5663.19,4488.19) 5663.19,4500 5446.81,4500 ccw(c5446.81,4488.19) 5435,4488.19 5435,3746.81
  lines w3.94: 4091.13,4524.32 3843.97,4351.23 ccw(c4508.61,3402.06) 3352.74,3483.57 3352.67,3482.25 3352.65,3480.93 3352.66,3479.61 3352.73,3478.3 3352.83,3476.98 3352.98,3475.67 3353.18,3474.36 3353.42,3473.06 3353.7,3471.77 3354.02,3470.49 3354.39,3469.22 3354.8,3467.97 3355.25,3466.73 3355.74,3465.5 3356.28,3464.29 3356.85,3463.11 3357.46,3461.94 3358.11,3460.79 3358.8,3459.67 3359.52,3458.57 3360.28,3457.5 3361.08,3456.45 3362.78,3454.44 3364.61,3452.54 3366.57,3450.77 3367.59,3449.93 3368.63,3449.13 3369.7,3448.37 3370.8,3447.64 3371.92,3446.95 3373.06,3446.3 3374.23,3445.68 3375.42,3445.11 3376.62,3444.57 3377.85,3444.07 3379.09,3443.62 3380.34,3443.21 3381.6,3442.84 3382.88,3442.51 3384.16,3442.23 3385.46,3441.99 3386.76,3441.79 3388.07,3441.63 3389.38,3441.52 3390.7,3441.46 3756.14,3441.43 ccw(c3756.14,3480.8) 3795.51,3480.8 3795.51,3653.95 cw(c3834.88,3653.95) 3834.88,3693.32 4878.76,3693.32 cw(c4878.76,3653.95) 4918.13,3653.95 4918.16,3441.37 ccw(c4957.53,3441.37) 4957.53,3402 5627.98,3402.05 ccw(c5627.98,3441.42) 5667.35,3441.42 5667.35,3628.39 5667.29,4405.74 5667.25,4520.41 5667.25,4521.52 ccw(c5450.96,4521.59) 5450.89,4737.87 4461.04,4737.98 4457.6,4737.9 4454.2,4737.76 4450.72,4737.57 4447.32,4737.32 4443.9,4737.03 4440.49,4736.67 4437.09,4736.27 4433.7,4735.81 4430.31,4735.29 4426.93,4734.72 4423.56,4734.1 4420.2,4733.43 4416.85,4732.7 4413.51,4731.92 4410.18,4731.08 4406.87,4730.2 4403.56,4729.26 4400.28,4728.26 4397,4727.22 4393.74,4726.12 4390.5,4724.97 4387.26,4723.76 4384.05,4722.5 4380.91,4721.22 4377.93,4719.94 4375.09,4718.68 4372.37,4717.42 4369.75,4716.17 4367.21,4714.91 4364.72,4713.64 4362.27,4712.34 4359.83,4711.01 4357.39,4709.64 4354.92,4708.21 4352.41,4706.72 4349.84,4705.14 4347.19,4703.45 4344.46,4701.66 4341.61,4699.73 4337.85,4697.1 4323.34,4686.94 4123.35,4546.88 ; 4091.78,4524.78 4122.53,4546.31

## Other copper
Top Layer:
  region net IO0: 4669.85,3765 4669.85,3775 ccw(c4669.85,3793.75) 4684.85,3782.5 4684.85,3757.5 ccw(c4669.85,3746.25)
  region net SERVO1: 4699.53,4548.39 4709.53,4548.39 ccw(c4728.28,4548.39) 4717.03,4533.39 4692.03,4533.39 ccw(c4680.78,4548.39)
  region net TOUCH2: 4760,4400.27 4750,4400.27 ccw(c4731.25,4400.27) 4742.5,4415.27 4767.5,4415.27 ccw(c4778.75,4400.27)
  region net TOUCH1: 4810,4400.27 4800,4400.27 ccw(c4781.25,4400.27) 4792.5,4415.27 4817.5,4415.27 ccw(c4828.75,4400.27)
  region net BAT_ADC: 5110,4400.27 5100,4400.27 ccw(c5081.25,4400.27) 5092.5,4415.27 5117.5,4415.27 ccw(c5128.75,4400.27)
  region net EN: 5265,4400.27 5255,4400.27 ccw(c5236.25,4400.27) 5247.5,4415.27 5272.5,4415.27 ccw(c5283.75,4400.27)
  region net VDD_3V3: 5289.53,4554.53 5319.53,4554.53 ccw(c5369.59,4554.53) 5324.22,4533.39 5284.85,4533.39 ccw(c5239.47,4554.53)
  region net LED_DI: 4575,3890 4575,3900 ccw(c4575,3912.44) 4586.41,3907.5 4586.41,3882.5 ccw(c4575,3877.56)
  region net SERVO2: 4719.52,3950 4719.52,3940 ccw(c4719.52,3921.25) 4704.52,3932.5 4704.52,3957.5 ccw(c4719.52,3968.75)
  region net SCL: 4571.41,3983.85 4571.41,3993.85 ccw(c4571.41,4012.6) 4586.41,4001.35 4586.41,3976.35 ccw(c4571.41,3965.1)
  region net SDA: 4571.41,4040 4571.41,4050 ccw(c4571.41,4068.75) 4586.41,4057.5 4586.41,4032.5 ccw(c4571.41,4021.25)
  region net TOUCH3: 4719.52,4300 4719.52,4290 ccw(c4719.52,4271.25) 4704.52,4282.5 4704.52,4307.5 ccw(c4719.52,4318.75)
  region net LED_DI: 3660,3950 3670,3950 ccw(c3788.62,3950) 3670.91,3935.37 3659.09,3935.37 ccw(c3541.38,3950)
  region net SERVO1: 4628.46,4630 4628.46,4620 ccw(c4628.46,4601.25) 4613.46,4612.5 4613.46,4637.5 ccw(c4628.46,4648.75)
  region net SERVO2: 4615.75,4496.32 4608.68,4489.25 4607.31,4490.36 4605.71,4491.24 4603.91,4491.89 4601.94,4492.36 4599.85,4492.65 4597.66,4492.8 4593.12,4492.76 4588.6,4492.43 4584.38,4492 4580.72,4491.66 4577.9,4491.6 4613.4,4527.1 4613.34,4524.28 4613,4520.62 4612.57,4516.4 4612.24,4511.88 4612.2,4507.34 4612.35,4505.15 4612.64,4503.06 4613.11,4501.09 4613.76,4499.29 4614.64,4497.69
  region net SDA: 4525,4039.02 4525,4049.02 ccw(c4522.93,4056.52) 4530.71,4056.52 4530.71,4033.65 ccw(c4525,4033.29)
  region net SDA: 4579.73,4050 4579.73,4040 ccw(c4579.73,4019.11) 4564.73,4033.65 4564.73,4057.5 ccw(c4579.73,4068.75)
  region net VDD_3V3: 4535,4169.72 4565,4169.72 ccw(c8280.5,4124.72) 4564.73,4124.72 4530.71,4124.72 ccw(c4296.76,4169.72)
  region net VDD_3V3: 4542.72,3947.28 4552.72,3947.28 ccw(c4560.22,3961.31) 4560.22,3945.4 4535.22,3945.4 ccw(c4535.22,3961.31)
  region net SCL: 4579.73,3993.85 4579.73,3983.85 ccw(c4579.73,3965.1) 4564.73,3976.35 4564.73,4001.35 ccw(c4579.73,4012.6)
  region net SCL: 4515.71,3990 4515.71,4000 ccw(c4515.71,4026.19) 4530.71,4004.72 4530.71,3982.5 ccw(c4515.71,3971.25)
  region net $1N106: 4043.22,4395.43 4043.22,4405.43 4045.03,4405.77 4047.3,4406.68 4049.63,4407.96 4051.63,4409.43 4051.63,4391.42 4049.63,4392.89 4047.3,4394.18 4045.03,4395.08
  region net $1N106: 3991.35,4250 3991.35,4240 3989.54,4239.66 3987.27,4238.75 3984.94,4237.47 3982.94,4235.99 3982.94,4254.01 3984.94,4252.53 3987.27,4251.25 3989.54,4250.34
  region net BAT_ADC: 5100,4406.35 5110,4406.35 5110.34,4404.54 5111.25,4402.27 5112.53,4399.94 5114.01,4397.94 5095.99,4397.94 5097.47,4399.94 5098.75,4402.27 5099.66,4404.54
  region net EN: 5255,4406.35 5265,4406.35 5265.34,4404.54 5266.25,4402.27 5267.53,4399.94 5269.01,4397.94 5250.99,4397.94 5252.47,4399.94 5253.75,4402.27 5254.66,4404.54
  region net LED_DI: 4543.65,3790 4543.65,3800 4545.46,3800.34 4547.73,3801.25 4550.06,3802.53 4552.06,3804.01 4552.06,3785.99 4550.06,3787.47 4547.73,3788.75 4545.46,3789.66
  region net LED_DI: 4568.02,3895.1 4575.1,3888.02 4574.06,3886.5 4573.1,3884.26 4572.36,3881.7 4571.98,3879.25 4559.25,3891.98 4561.7,3892.36 4564.26,3893.1 4566.5,3894.06
  region net SERVO2: 4958.65,4315 4958.65,4325 4960.46,4325.34 4962.73,4326.25 4965.06,4327.53 4967.06,4329.01 4967.06,4310.99 4965.06,4312.47 4962.73,4313.75 4960.46,4314.66
  region net SERVO2: 4958.65,4265 4958.65,4275 4960.46,4275.34 4962.73,4276.25 4965.06,4277.53 4967.06,4279.01 4967.06,4260.99 4965.06,4262.47 4962.73,4263.75 4960.46,4264.66
  region net IO0: 4661.35,3775 4661.35,3765 4659.54,3764.66 4657.27,3763.75 4654.94,3762.47 4652.94,3760.99 4652.94,3779.01 4654.94,3777.53 4657.27,3776.25 4659.54,3775.34
  region net VDD_3V3: 5391.59,4560 5386.59,4590 5387.22,4589.82 5387.85,4589.32 5389.08,4587.54 5390.27,4585.08 5391.4,4582.34 5392.46,4579.72 5393.42,4577.63 5393.86,4576.9 5394.28,4576.47 5394.65,4576.36 5395,4576.65 5400,4559.08 5398.71,4559.42 5396.62,4559.71
  region net VDD_3V3: 4506.35,3965 4506.35,3955 4504.54,3954.66 4502.27,3953.75 4499.94,3952.47 4497.94,3950.99 4497.94,3969.01 4499.94,3967.53 4502.27,3966.25 4504.54,3965.34
  region net SCL: 4771.35,4070 4771.35,4060 4769.54,4059.66 4767.27,4058.75 4764.94,4057.47 4762.94,4055.99 4762.94,4074.01 4764.94,4072.53 4767.27,4071.25 4769.54,4070.34
  region net SCL: 5328.65,4060 5328.65,4070 5330.46,4070.34 5332.73,4071.25 5335.06,4072.53 5337.06,4074.01 5337.06,4055.99 5335.06,4057.47 5332.73,4058.75 5330.46,4059.66
  region net SDA: 4539.73,4049.02 4542.21,4039.02 4541.35,4038.91 4540.36,4038.62 4538.18,4037.59 4536.05,4036.13 4534.34,4034.46 4531.32,4052.22 4533.5,4051.04 4535.89,4050.02 4538.1,4049.29
  region net SDA: 4768.85,4027.99 4773.34,4017.99 4772.3,4017.89 4771.16,4017.59 4768.77,4016.51 4766.56,4015 4765.65,4014.14 4764.94,4013.26 4760.45,4030.7 4762.67,4029.71 4765.07,4028.84 4767.26,4028.22
  region net SDA: 5298.65,4017.99 5298.65,4027.99 5300.46,4028.34 5302.73,4029.24 5305.06,4030.53 5307.06,4032 5307.06,4013.99 5305.06,4015.46 5302.73,4016.74 5300.46,4017.65
  region net SCL: 4466.35,4070 4466.35,4060 4464.54,4059.66 4462.27,4058.75 4459.94,4057.47 4457.94,4055.99 4457.94,4074.01 4459.94,4072.53 4462.27,4071.25 4464.54,4070.34
  region net SDA: 4488.65,3765 4488.65,3775 4490.46,3775.34 4492.73,3776.25 4495.06,3777.53 4497.06,3779.01 4497.06,3760.99 4495.06,3762.47 4492.73,3763.75 4490.46,3764.66
  region net SDA: 4293.02,3750.1 4300.1,3743.02 4299.06,3741.5 4298.1,3739.26 4297.36,3736.7 4296.98,3734.25 4284.25,3746.98 4286.7,3747.36 4289.26,3748.1 4291.5,3749.06
VCC:
  region net VCC_5V: 4495,4579.44 4465,4579.44 4464.7,4582.98 4463.9,4586.52 4462.69,4589.96 4461.22,4593.23 4459.58,4596.24 4457.9,4598.91 4456.3,4601.14 4454.9,4602.87 4505.1,4602.87 4503.7,4601.14 4502.1,4598.91 4500.42,4596.24 4498.78,4593.23 4497.31,4589.96 4496.1,4586.52 4495.3,4582.98
  region net VCC_5V: 4465,4570.56 4495,4570.56 4495.3,4567.02 4496.1,4563.48 4497.31,4560.04 4498.78,4556.77 4500.42,4553.76 4502.1,4551.09 4503.7,4548.86 4505.1,4547.13 4454.9,4547.13 4456.3,4548.86 4457.9,4551.09 4459.58,4553.76 4461.22,4556.77 4462.69,4560.04 4463.9,4563.48 4464.7,4567.02
  region net VCC_5V: 4500,4483.44 4470,4480 4469.91,4481.46 4469.65,4482.94 4468.69,4485.89 4467.27,4488.77 4465.54,4491.5 4463.65,4494.01 4461.74,4496.21 4459.98,4498.02 4458.49,4499.36 4508.12,4506.86 4505.72,4502.76 4504.37,4500.09 4503.05,4497.1 4501.86,4493.87 4500.89,4490.47 4500.24,4486.96
  region net SDA: 4530,4025.66 4520,4025.66 4519.66,4027.47 4518.75,4029.74 4517.47,4032.07 4515.99,4034.07 4534.01,4034.07 4532.53,4032.07 4531.25,4029.74 4530.34,4027.47
  region net TOUCH2: 5357.87,3525 5363.91,3515 5362.78,3514.89 5361.58,3514.58 5359.14,3513.49 5356.98,3511.93 5356.13,3511.06 5355.5,3510.15 5349.46,3527.12 5351.68,3526.34 5354.08,3525.66 5356.27,3525.18
  region net TOUCH2: 5488.65,3505 5488.65,3515 5490.46,3515.34 5492.73,3516.25 5495.06,3517.53 5497.06,3519.01 5497.06,3500.99 5495.06,3502.47 5492.73,3503.75 5490.46,3504.66
  region net SCL: 4455,4048.65 4445,4048.65 4444.66,4050.46 4443.75,4052.73 4442.47,4055.06 4440.99,4057.06 4459.01,4057.06 4457.53,4055.06 4456.25,4052.73 4455.34,4050.46
  region net SCL: 4143.21,3776.26 4150.28,3769.19 4149.24,3767.67 4148.28,3765.42 4147.54,3762.87 4147.17,3760.41 4134.43,3773.15 4136.88,3773.52 4139.44,3774.26 4141.68,3775.23
  region net SDA: 3730.34,3696.69 3740.34,3696.69 3740.68,3694.88 3741.59,3692.61 3742.88,3690.28 3744.35,3688.28 3726.33,3688.28 3727.8,3690.28 3729.09,3692.61 3730,3694.88
  region net SDA: 3999.9,3778.02 4006.98,3785.1 4008.5,3784.06 4010.74,3783.1 4013.3,3782.36 4015.75,3781.98 4003.02,3769.25 4002.64,3771.7 4001.9,3774.26 4000.94,3776.5
  region net SDA: 4500,3786.35 4510,3786.35 4510.34,3784.54 4511.25,3782.27 4512.53,3779.94 4514.01,3777.94 4495.99,3777.94 4497.47,3779.94 4498.75,3782.27 4499.66,3784.54
  region net VDD_3V3: 5074.17,4120 ccw(c4924.17,4120) 5044.17,4210 5089.17,4225 5134.17,4210 ccw(c5254.17,4120) 5104.17,4120